# Altium PCB PCB1.PcbDoc
Units mm, origin at the board's own origin, x right, y up, seen from the top; angles counter-clockwise.
Board outline 45 x 30 mm, 2 copper layers (Top Layer, Bottom Layer); 10 components, 4 nets, 21 pads, 0 vias.
Unrouted connection lines stored in the file: 7.
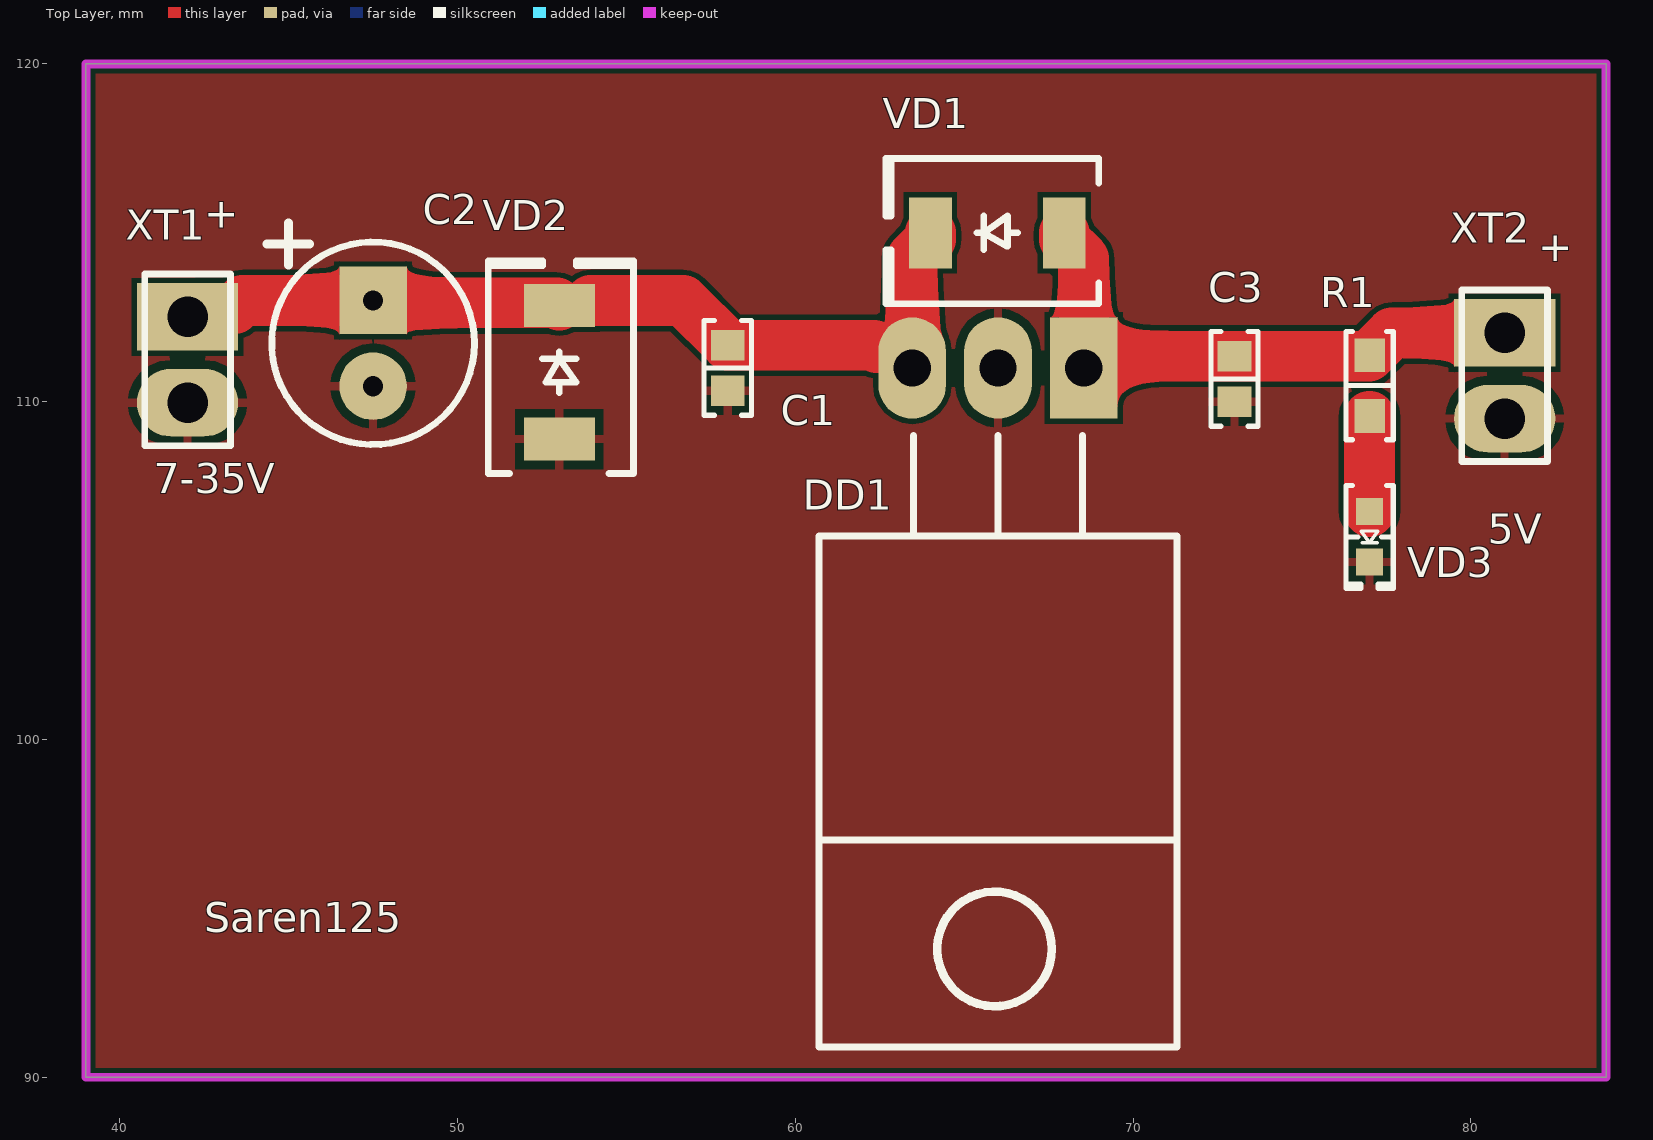
[diagram p0: Top Layer view]
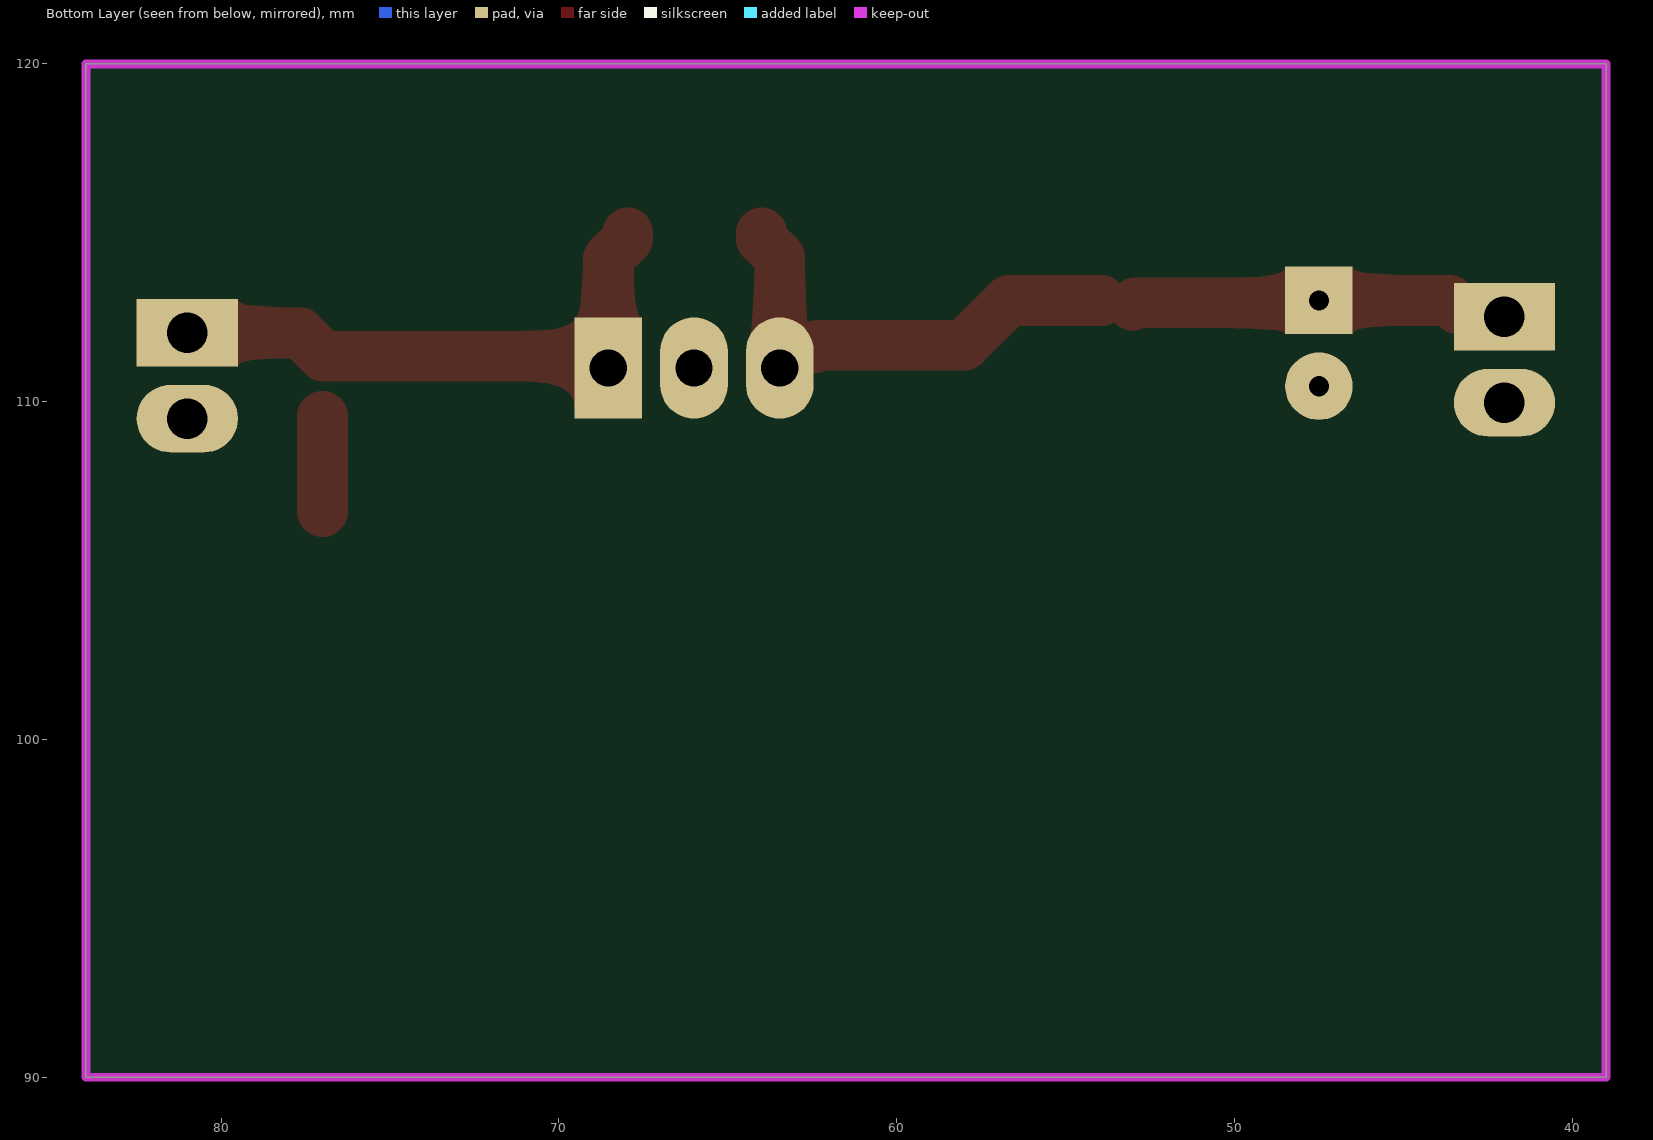
[diagram p1: Bottom Layer view, seen from below]
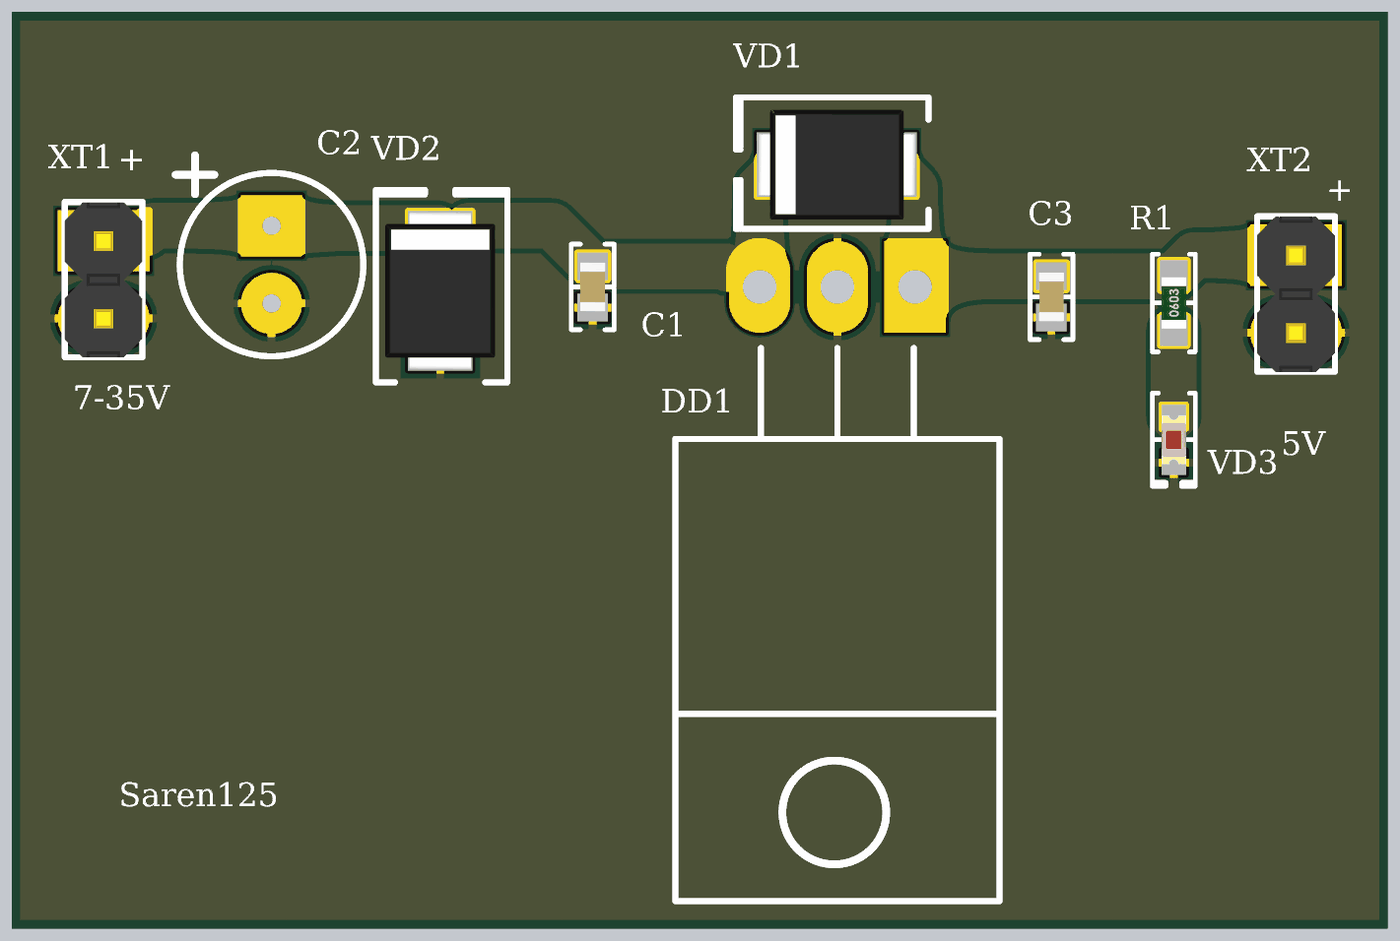
[diagram p2: 3D render of the assembled board from above, using the file's embedded part models]

## Layer stack, top to bottom
Top Solder: solder mask 0.0102, Solder Resist, Dk 3.5
Top Layer: signal copper 0.0356
Dielectric 1: dielectric 0.32, FR-4, Dk 4.8
Bottom Layer: signal copper 0.0356
Bottom Solder: solder mask 0.0102, Solder Resist, Dk 3.5

## Board outline
39,90 84,90 84,120 39,120

## Design rules (kind name [scope] priority, off if disabled: settings)
Clearance [All] p1: gap=0.15 ignorepadtopadclearanceinfootprint=FALSE
MinimumSolderMaskSliver [All] p1: minsoldermaskwidth=0.1
PolygonConnect [All] p1: connectstyle=Relief reliefconductorwidth=0.254 reliefentries=4 polygonreliefangle="90 Angle" airgapwidth=0.254
RoutingVias [All] p1: holewidth=0.3 width=0.6 viastyle="Through Hole" minholewidth=0.3 minwidth=0.6 maxholewidth=0.3 maxwidth=0.6
SilkToSolderMaskClearance [IsPad] p1: minsilkscreentomaskgap=0.1 clearancetoexposedcopper=TRUE
SolderMaskExpansion [All] p1: expansion=0.102 istentingtop=FALSE
Width [All] p1: maxlimit=1.5 minlimit=0.15 preferedwidth=0.25
28 further rules are at their usual default settings.

## Components (designator, comment, footprint, x,y, rotation, side; value= is the part's Value field where it differs from the comment)
C1 "Capacitor" Cap_0603 58,111 r90 top value="0.1 uF"
C2 "Capacitor_Polar" CapDip5S 47.5,113 r180 top value="10 uF 50V"
C3 "Capacitor" Cap_0603 73,110.675 r90 top value="0.1 uF"
DD1 "Стабилизатор" TO-220A-L 66,111 r180 top
R1 "Resistor" RES_0603 77,110.475 r90 top value=1K
VD1 "Diode" SMB 65.981,114.994 r180 top
VD2 "Diode" SMB 53.006,110.873 r90 top
VD3 "LED" "LED 0603_1608 RED" 77,106 r270 top value="red led 0603"
XT1 "Header 1x2" PLS-2 42,112.5 r270 top value=PLS-2
XT2 "Header 1x2" PLS-2 80.993,112.029 r270 top value=PLS-2

## Footprints (in the part's own frame and the unit in brackets; to place one, negate y for a bottom-side part, rotate by r counter-clockwise, add the part's x,y. Pads: shape width x height; smd on the part's side, far side on the other; paste and mask are expansions set on the pad)
Cap_0603 [mm]
  rect 0.9x1 smd: 1(-0.675,0) 2(0.675,0)
  silkscreen extent -1.4,-0.7 1.4,0.7, body extent -0.8,-0.41 0.8,0.41, height 0.82
CapDip5S [mm]
  rect 2x2 hole 0.6: 1(0,0)
  round 2 hole 0.6: 2(0,2.54)
  silkscreen extent -3,-2.3 3.14,4.27, body extent -2.5,-1.23 2.5,3.77, height 13.1
"LED 0603_1608 RED" [mm] "Chip Diode, 2-Leads, Body 1.60x0.80mm, IPC Medium Density"
  rect 0.8x0.8 smd: 1(-0.75,0) 2(0.75,0)
  silkscreen extent -1.52,-0.7 1.52,0.7, body extent -0.8,-0.4 0.8,0.4, height 0.53
PLS-2 [mm]
  rect 2x3 hole 1.2: 1(-0.011,0.007)
  oval 2x3 hole 1.2: 2(2.529,0.007)
  silkscreen extent -1.28,-1.26 3.8,1.28, body extent -1.27,-1.27 3.81,1.27, height 8.6
RES_0603 [mm] "Chip Resistor, 2-Leads, Body 1.60x0.80mm, IPC Medium Density"
  rect 1x0.9 smd: 1(-0.9,0) 2(0.9,0)
  silkscreen extent -1.6,-0.7 1.6,0.7, body extent -0.85,-0.4 0.85,0.4, height 0.45
SMB [mm]
  rect 1.27x2.1 smd: 1(-1.979,-0.006) 2(1.981,-0.006)
  silkscreen extent -3,-2.21 3.3,2.09, body extent -2.6,-1.81 2.6,1.79, height 2.4
TO-220A-L [mm]
  oval 2x3 hole 1.1: 1(2.54,0) 2(0,0)
  rect 2x3 hole 1.1: 3(-2.54,0)
  silkscreen extent -5.3,2 5.3,20.1, body extent -5.33,-0.25 5.25,20.12, height 6

## Part data
C1 C3: "Конденсатор", Package=0805
C2: "Конденсатор эл-лит", Package=DIP
DD1: Package=TO220, Name=LM7805
R1: "Резистор", Package=0805
VD1 VD2: "Диод"
  VD1: Name=ES2D
  VD2: Name=SS220
VD3: "Светодиод", Package=DIP
XT1 XT2: "Header 1x3", Name=Jamper

## Nets (pads, with @x,y where several pads share a name; then routed paths per layer and width w, separated by ;. In a path a pad name is that pad's centre, name@x,y a point inside that pad or via, vN(x,y) a via of type N, cw(c..) or ccw(c..) an arc to the next point about the centre after c; other vN are vias at no path point)
GND: C1.1 C2.2 C3.1 DD1.2 VD2.1 VD3.2 XT1.2 XT2.2
NetR1_1: R1.1 VD3.1 | length 2.8
  Top Layer w1.5: VD3.1 R1.1
vin: C1.2 C2.1 DD1.1 VD1.2 VD2.2 XT1.1 | length 25.8
  Top Layer w1.5: XT1.1 42.257,112.761 43.397,112.761 43.636,113 C2.1 47.573,112.927 52.94,112.927 VD2.2 ; VD2.2@53.944,113 56.675,113 C1.2 60.325,111.675 62.331,111.675 62.411,111.596 63.229,111.596 DD1.1@63.46,111.365 ; DD1.1@63.556,111.096 DD1.1 DD1.1@63.46,111.365 ; VD1.2 64,114.815 63.46,114.275 DD1.1@63.46,111.365
vout: C3.2 DD1.3 R1.2 VD1.1 XT2.1 | length 17.1
  Top Layer w1.5: VD1.1 67.96,114.815 68.54,114.235 DD1.3 ; DD1.3@68.54,111.1 68.79,111.35 C3.2 76.975,111.35 R1.2 77.665,112.04 XT2.1

## Polygon pours and split planes (outlines as drawn)
no net on Top Layer "NONET_L01_P008" (solid, pour order 8): 39,120 84,120 84,90 39,90
GND on Top Layer "GND_L01_P007" (solid, pour order 7): 52,116
GND on Top Layer "GND_L01_P006" (solid, pour order 6): 39,120 84,120 84,90 39,90
GND on Top Layer "GND_L01_P005" (solid, pour order 5): 43,93.5
GND on Top Layer "GND_L01_P004" (solid, pour order 4): 39,120 84,120 84,90 39,90
GND on Top Layer "GND_L01_P003" (solid, pour order 3): 35.5,92.5
GND on Top Layer "GND_L01_P002" (solid, pour order 2): 39,120 84,120 84,90 39,90
GND on Top Layer "GND_L01_P001" (solid, pour order 1): 63,86.5

## Keep-outs
Keep-Out Layer:
  the board outline again, w0.254

## Silkscreen, mask and mechanical layers (free items; w line width, h text height)
Top Overlay:
  text "+" at 42.5,114.858 h1.52
  text "+" at 82,113.858 h1.52
  text "7-35V" at 41,107 h1.52
  text "5V" at 80.5,105.5 h1.52
  text "Saren125" at 42.5,94.003 h1.52